# EAGLE board USB-C_Host_Shield-Panel (EAGLE 9.6.2), part 1 of 4
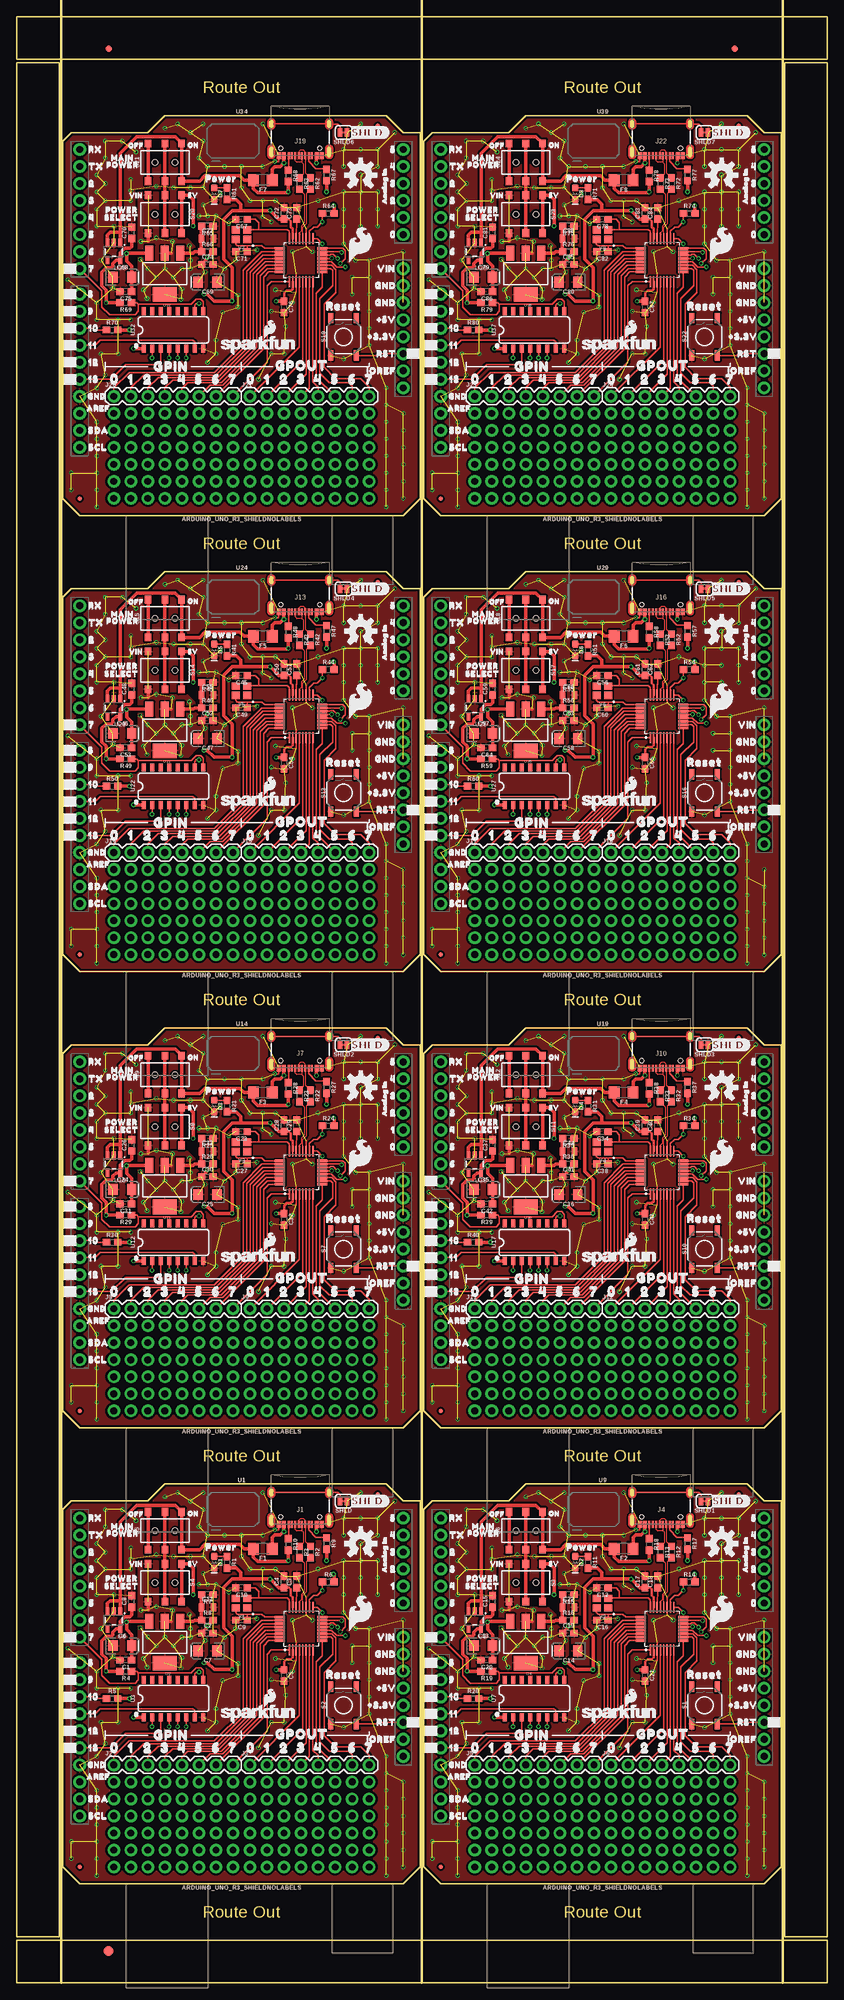
[diagram p0: board, top side]
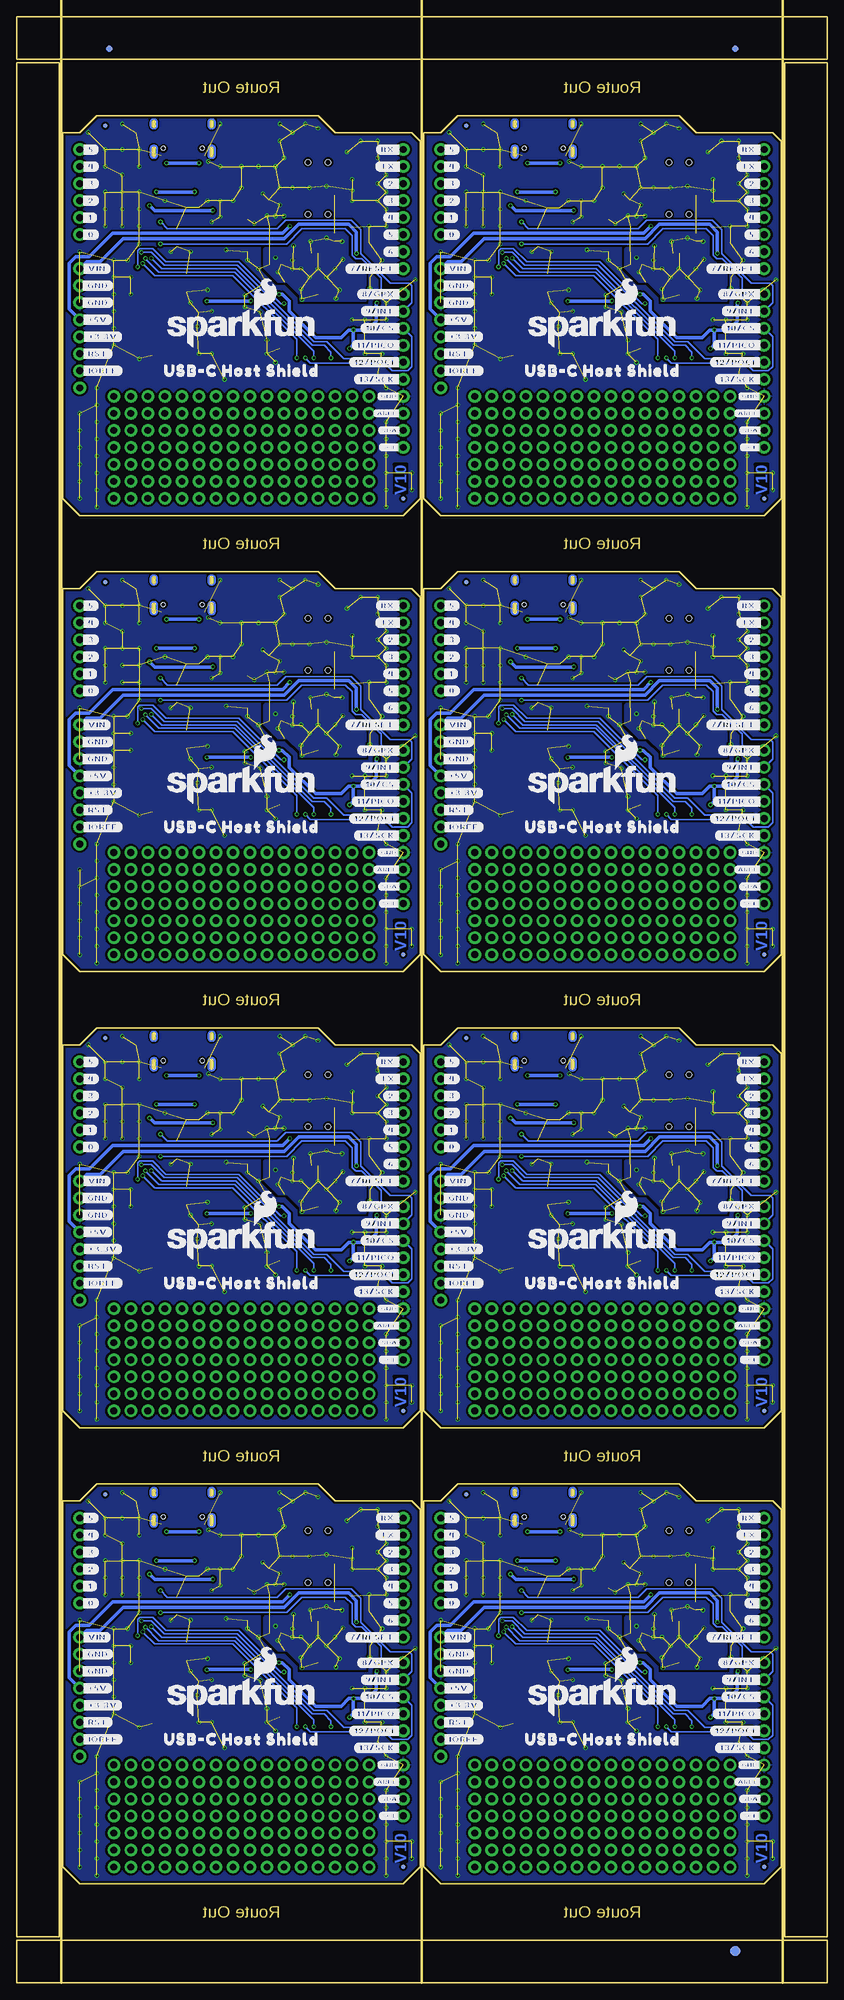
[diagram p1: board, bottom side, seen from below]

Size 120.9 x 293.37 mm. Coordinates in mm from the lower left corner, seen from the top.
Outline: 9.4,14.73 57.66,14.73 60.2,17.27 60.2,71.88 57.66,71.88 55.12,74.42 22.1,74.42 19.56,71.88 8.13,71.88 6.86,70.61 6.86,17.27 9.4,14.73
Outline: 63.25,14.73 111.51,14.73 114.05,17.27 114.05,71.88 111.51,71.88 108.97,74.42 75.95,74.42 73.41,71.88 61.98,71.88 60.71,70.61 60.71,17.27 63.25,14.73
Outline: 9.4,82.8 57.66,82.8 60.2,85.34 60.2,139.95 57.66,139.95 55.12,142.49 22.1,142.49 19.56,139.95 8.13,139.95 6.86,138.68 6.86,85.34 9.4,82.8
Outline: 63.25,82.8 111.51,82.8 114.05,85.34 114.05,139.95 111.51,139.95 108.97,142.49 75.95,142.49 73.41,139.95 61.98,139.95 60.71,138.68 60.71,85.34 63.25,82.8
Outline: 9.4,150.88 57.66,150.88 60.2,153.42 60.2,208.03 57.66,208.03 55.12,210.57 22.1,210.57 19.56,208.03 8.13,208.03 6.86,206.76 6.86,153.42 9.4,150.88
Outline: 63.25,150.88 111.51,150.88 114.05,153.42 114.05,208.03 111.51,208.03 108.97,210.57 75.95,210.57 73.41,208.03 61.98,208.03 60.71,206.76 60.71,153.42 63.25,150.88
Outline: 9.4,218.95 57.66,218.95 60.2,221.49 60.2,276.1 57.66,276.1 55.12,278.64 22.1,278.64 19.56,276.1 8.13,276.1 6.86,274.83 6.86,221.49 9.4,218.95
Outline: 63.25,218.95 111.51,218.95 114.05,221.49 114.05,276.1 111.51,276.1 108.97,278.64 75.95,278.64 73.41,276.1 61.98,276.1 60.71,274.83 60.71,221.49 63.25,218.95
Outline: 0,6.35 120.9,6.35 120.9,0 0,0 0,6.35
Outline: 114.55,286.51 120.9,286.51 120.9,6.86 114.55,6.86 114.55,286.51
Outline: 0,293.37 120.9,293.37 120.9,287.02 0,287.02 0,293.37
Outline: 0,286.51 6.35,286.51 6.35,6.86 0,6.86 0,286.51
Copper layers (1*16): Top 0.035mm / dielectric 1.5mm / Bottom 0.035mm
Design rules "USB-C_Host_Shield": minimum track width 5mil, minimum drill 0.3mm, track to track 5mil, track to pad 5mil, pad to pad 5mil, via to via 5mil, smd to smd 5mil, copper to edge 7mil, drill to drill 7mil, minimum pad ring 5mil, minimum via ring 5mil, stop-mask expansion 2.5mil, vias tented up to drill 25mil, thermal gap 10mil
Net classes: 2 diff pairs: width 0.089 mm
Milling: 3 lines

## Footprints (pad centres in the part's own frame; a part is rotated, then mirrored left to right if it is on the bottom)
0603 = smd 1.1 x 1: 1 -0.85,0; 2 0.85,0
EIA3216 = smd 1.4 x 1.6: + 1.4,0; - -1.4,0
0805 = smd 0.8 x 1.2: 1 -0.9,0; 2 0.9,0
LED-0603 = smd 1 x 1: A -0.877,0; C 0.877,0
FIDUCIAL-1X2 = smd 1 x 1: 1 0,0
FIDUCIAL-1.5X3 = smd 1.5 x 1.5: 1 0,0
1206 = smd 1.6 x 1.8: 1 -1.4,0; 2 1.4,0
FIDUCIAL-MICRO = smd 0.635 x 0.635: 1 0,0
USB-C-16P-2LAYER-PADS = smd 0.3 x 1: A5 -1.25,-0.34; A6 -0.25,-0.34; A7 0.25,-0.34; A8 1.25,-0.34; B5 1.75,-0.34; B6 0.75,-0.34; B7 -0.75,-0.34; B8 -1.75,-0.34 | smd 0.6 x 1: GND -3.225,-0.34; GND2 3.225,-0.34; VBUS1 -2.45,-0.34; VBUS2 2.45,-0.34 | drill 0.4 pad 0.6 long: SHLD1 -4.318,-0.915; SHLD2 4.318,-0.915; SHLD3 -4.318,-5.095; SHLD4 4.318,-5.095 | hole 0.65: -2.89,-1.445; 2.89,-1.445
1X08 = drill 1.016 pad 1.88: 1 0,0; 2 2.54,0; 3 5.08,0; 4 7.62,0; 5 10.16,0; 6 12.7,0; 7 15.24,0; 8 17.78,0
TACTILE_SWITCH_SMD_5.2MM = smd 1.524 x 0.762: 1 -2.794,1.905; 2 2.794,1.905; 3 -2.794,-1.905; 4 2.794,-1.905
SWITCH_DPDT_SMD_AYZ0202 = smd 1 x 1.15: 1 -2.5,2.825; 2 0,2.825; 3 2.5,2.825; 4 -2.5,-2.825; 5 0,-2.825; 6 2.5,-2.825 | hole 0.85: 1.5,0; -1.5,0
SMT-JUMPER_2_NC_TRACE_SILK = smd 0.66 x 1.27: 1 -0.521,0; 2 0.521,0
UNO_R3_SHIELD_NOLABELS = drill 1.016 pad 1.88: 3.3V 24.13,-3.81; 5V 24.13,-1.27; A0 24.13,11.43; A1 24.13,13.97; A2 24.13,16.51; A3 24.13,19.05; A4 24.13,21.59; A5 24.13,24.13; AREF -24.13,-15.24; D2 -24.13,19.05; D3 -24.13,16.51; D4 -24.13,13.97; D5 -24.13,11.43; D6 -24.13,8.89; D7 -24.13,6.35; D8 -24.13,2.54; D9 -24.13,0; D10 -24.13,-2.54; D11 -24.13,-5.08; D12 -24.13,-7.62; D13 -24.13,-10.16; GND@0 24.13,1.27; GND@1 24.13,3.81; GND@2 -24.13,-12.7; IOREF 24.13,-8.89; NC 24.13,-11.43; RES 24.13,-6.35; RX -24.13,24.13; SCL -24.13,-20.32; SDA -24.13,-17.78; TX -24.13,21.59; VIN 24.13,6.35
SOT223 = smd 1.219 x 2.235: 1 -2.311,-3.099; 2 0,-3.099; 3 2.311,-3.099 | smd 3.6 x 2.2: 4 0,3.099
SO16 = smd 0.6 x 1.2: 1 -4.445,-2.8; 2 -3.175,-2.8; 3 -1.905,-2.8; 4 -0.635,-2.8; 5 0.635,-2.8; 6 1.905,-2.8; 7 3.175,-2.8; 8 4.445,-2.8; 9 4.445,2.8; 10 3.175,2.8; 11 1.905,2.8; 12 0.635,2.8; 13 -0.635,2.8; 14 -1.905,2.8; 15 -3.175,2.8; 16 -4.445,2.8
TQFP32 = smd 1.56 x 0.28: 1 -3.18,1.75; 2 -3.18,1.25; 3 -3.18,0.75; 4 -3.18,0.25; 5 -3.18,-0.25; 6 -3.18,-0.75; 7 -3.18,-1.25; 8 -3.18,-1.75; 17 3.18,-1.75; 18 3.18,-1.25; 19 3.18,-0.75; 20 3.18,-0.25; 21 3.18,0.25; 22 3.18,0.75; 23 3.18,1.25; 24 3.18,1.75 | smd 0.28 x 1.56: 9 -1.75,-3.18; 10 -1.25,-3.18; 11 -0.75,-3.18; 12 -0.25,-3.18; 13 0.25,-3.18; 14 0.75,-3.18; 15 1.25,-3.18; 16 1.75,-3.18; 25 1.75,3.18; 26 1.25,3.18; 27 0.75,3.18; 28 0.25,3.18; 29 -0.25,3.18; 30 -0.75,3.18; 31 -1.25,3.18; 32 -1.75,3.18
SOT23-5 = smd 0.55 x 1.2: 1 -0.95,-1.3; 2 0,-1.3; 3 0.95,-1.3; 4 0.95,1.3; 5 -0.95,1.3
CRYSTAL-SMD-2X2.5MM = smd 1.2 x 1.1: P1 0.846,0.69; P2 -0.854,0.69; P3 -0.854,-0.71; P4 0.846,-0.71

## Placement (x,y rotation side)
C1  0.1uF  [0603]  16.26,48.13 180 top
C2  0.1uF  [0603]  28.45,52.2 0 top
C3  0.1uF  [0603]  41.78,59.82 90 top
C4  0.1uF  [0603]  39.88,59.82 90 top
C5  0.1uF  [0603]  39.88,45.85 270 top
C6  10uF  [EIA3216]  15.75,50.29 0 top
C7  10uF  [EIA3216]  28.45,49.53 180 top
C8  10uF  [0603]  17.14,56.9 90 top
C9  18pF  [0603]  33.53,54.1 180 top
C10  18pF  [0603]  33.53,58.93 180 top
C11  10uF  [0805]  28.45,56.01 0 top
C12  18pF  [0603]  87.38,58.93 180 top
C13  10uF  [EIA3216]  69.6,50.29 0 top
C14  10uF  [EIA3216]  82.3,49.53 180 top
C15  10uF  [0603]  70.99,56.9 90 top
C16  18pF  [0603]  87.38,54.1 180 top
C17  0.1uF  [0603]  93.73,59.82 90 top
C18  0.1uF  [0603]  95.63,59.82 90 top
C19  0.1uF  [0603]  82.3,52.2 0 top
C20  0.1uF  [0603]  70.1,48.13 180 top
C21  0.1uF  [0603]  93.73,45.85 270 top
C22  10uF  [0805]  82.3,56.01 0 top
C23  18pF  [0603]  33.53,127 180 top
C24  10uF  [EIA3216]  15.75,118.36 0 top
C25  10uF  [EIA3216]  28.45,117.6 180 top
C26  10uF  [0603]  17.14,124.97 90 top
C27  18pF  [0603]  33.53,122.17 180 top
C28  0.1uF  [0603]  39.88,127.89 90 top
C29  0.1uF  [0603]  41.78,127.89 90 top
C30  0.1uF  [0603]  28.45,120.27 0 top
C31  0.1uF  [0603]  16.26,116.2 180 top
C32  0.1uF  [0603]  39.88,113.92 270 top
C33  10uF  [0805]  28.45,124.08 0 top
C34  18pF  [0603]  87.38,127 180 top
C35  10uF  [EIA3216]  69.6,118.36 0 top
C36  10uF  [EIA3216]  82.3,117.6 180 top
C37  10uF  [0603]  70.99,124.97 90 top
C38  18pF  [0603]  87.38,122.17 180 top
C39  0.1uF  [0603]  93.73,127.89 90 top
C40  0.1uF  [0603]  95.63,127.89 90 top
C41  0.1uF  [0603]  82.3,120.27 0 top
C42  0.1uF  [0603]  70.1,116.2 180 top
C43  0.1uF  [0603]  93.73,113.92 270 top
C44  10uF  [0805]  82.3,124.08 0 top
C45  18pF  [0603]  33.53,195.07 180 top
C46  10uF  [EIA3216]  15.75,186.44 0 top
C47  10uF  [EIA3216]  28.45,185.67 180 top
C48  10uF  [0603]  17.14,193.04 90 top
C49  18pF  [0603]  33.53,190.25 180 top
C50  0.1uF  [0603]  39.88,195.96 90 top
C51  0.1uF  [0603]  41.78,195.96 90 top
C52  0.1uF  [0603]  28.45,188.34 0 top
C53  0.1uF  [0603]  16.26,184.28 180 top
C54  0.1uF  [0603]  39.88,181.99 270 top
C55  10uF  [0805]  28.45,192.15 0 top
C56  18pF  [0603]  87.38,195.07 180 top
C57  10uF  [EIA3216]  69.6,186.44 0 top
C58  10uF  [EIA3216]  82.3,185.67 180 top
C59  10uF  [0603]  70.99,193.04 90 top
C60  18pF  [0603]  87.38,190.25 180 top
C61  0.1uF  [0603]  93.73,195.96 90 top
C62  0.1uF  [0603]  95.63,195.96 90 top
C63  0.1uF  [0603]  82.3,188.34 0 top
C64  0.1uF  [0603]  70.1,184.28 180 top
C65  0.1uF  [0603]  93.73,181.99 270 top
C66  10uF  [0805]  82.3,192.15 0 top
C67  18pF  [0603]  33.53,263.14 180 top
C68  10uF  [EIA3216]  15.75,254.51 0 top
C69  10uF  [EIA3216]  28.45,253.75 180 top
C70  10uF  [0603]  17.14,261.11 90 top
C71  18pF  [0603]  33.53,258.32 180 top
C72  0.1uF  [0603]  39.88,264.03 90 top
C73  0.1uF  [0603]  41.78,264.03 90 top
C74  0.1uF  [0603]  28.45,256.41 0 top
C75  0.1uF  [0603]  16.26,252.35 180 top
C76  0.1uF  [0603]  39.88,250.06 270 top
C77  10uF  [0805]  28.45,260.22 0 top
C78  18pF  [0603]  87.38,263.14 180 top
C79  10uF  [EIA3216]  69.6,254.51 0 top
C80  10uF  [EIA3216]  82.3,253.75 180 top
C81  10uF  [0603]  70.99,261.11 90 top
C82  18pF  [0603]  87.38,258.32 180 top
C83  0.1uF  [0603]  93.73,264.03 90 top
C84  0.1uF  [0603]  95.63,264.03 90 top
C85  0.1uF  [0603]  82.3,256.41 0 top
C86  0.1uF  [0603]  70.1,252.35 180 top
C87  0.1uF  [0603]  93.73,250.06 270 top
C88  10uF  [0805]  82.3,260.22 0 top
D1  RED  [LED-0603]  29.46,62.74 270 top
D2  RED  [LED-0603]  83.31,62.74 270 top
D3  RED  [LED-0603]  29.46,130.81 270 top
D4  RED  [LED-0603]  83.31,130.81 270 top
D5  RED  [LED-0603]  29.46,198.88 270 top
D6  RED  [LED-0603]  83.31,198.88 270 top
D7  RED  [LED-0603]  29.46,266.95 270 top
D8  RED  [LED-0603]  83.31,266.95 270 top
E$1  [FIDUCIAL-1X2]  13.72,288.61 0 top
E$2  [FIDUCIAL-1X2]  13.72,288.61 0 bottom
E$3  [FIDUCIAL-1X2]  107.12,288.61 0 top
E$4  [FIDUCIAL-1X2]  107.12,288.61 0 bottom
E$5  [FIDUCIAL-1.5X3]  13.72,4.76 0 top
E$6  [FIDUCIAL-1.5X3]  13.72,4.76 0 bottom
F1  6V/0.75A  [1206]  36.7,64.77 180 top
F2  6V/0.75A  [1206]  90.55,64.77 180 top
F3  6V/0.75A  [1206]  36.7,132.84 180 top
F4  6V/0.75A  [1206]  90.55,132.84 180 top
F5  6V/0.75A  [1206]  36.7,200.91 180 top
F6  6V/0.75A  [1206]  90.55,200.91 180 top
F7  6V/0.75A  [1206]  36.7,268.99 180 top
F8  6V/0.75A  [1206]  90.55,268.99 180 top
FD1  FIDUCIALUFIDUCIAL  [FIDUCIAL-MICRO]  9.4,17.27 0 bottom
FD2  FIDUCIALUFIDUCIAL  [FIDUCIAL-MICRO]  9.4,17.27 90 top
FD3  FIDUCIALUFIDUCIAL  [FIDUCIAL-MICRO]  53.85,72.9 0 bottom
FD4  FIDUCIALUFIDUCIAL  [FIDUCIAL-MICRO]  53.85,72.9 0 top
FD5  FIDUCIALUFIDUCIAL  [FIDUCIAL-MICRO]  63.25,17.27 0 bottom
FD6  FIDUCIALUFIDUCIAL  [FIDUCIAL-MICRO]  63.25,17.27 90 top
FD7  FIDUCIALUFIDUCIAL  [FIDUCIAL-MICRO]  107.7,72.9 0 bottom
FD8  FIDUCIALUFIDUCIAL  [FIDUCIAL-MICRO]  107.7,72.9 0 top
FD9  FIDUCIALUFIDUCIAL  [FIDUCIAL-MICRO]  9.4,85.34 0 bottom
FD10  FIDUCIALUFIDUCIAL  [FIDUCIAL-MICRO]  9.4,85.34 90 top
FD11  FIDUCIALUFIDUCIAL  [FIDUCIAL-MICRO]  53.85,140.97 0 bottom
FD12  FIDUCIALUFIDUCIAL  [FIDUCIAL-MICRO]  53.85,140.97 0 top
FD13  FIDUCIALUFIDUCIAL  [FIDUCIAL-MICRO]  63.25,85.34 0 bottom
FD14  FIDUCIALUFIDUCIAL  [FIDUCIAL-MICRO]  63.25,85.34 90 top
FD15  FIDUCIALUFIDUCIAL  [FIDUCIAL-MICRO]  107.7,140.97 0 bottom
FD16  FIDUCIALUFIDUCIAL  [FIDUCIAL-MICRO]  107.7,140.97 0 top
FD17  FIDUCIALUFIDUCIAL  [FIDUCIAL-MICRO]  9.4,153.42 0 bottom
FD18  FIDUCIALUFIDUCIAL  [FIDUCIAL-MICRO]  9.4,153.42 90 top
FD19  FIDUCIALUFIDUCIAL  [FIDUCIAL-MICRO]  53.85,209.04 0 bottom
FD20  FIDUCIALUFIDUCIAL  [FIDUCIAL-MICRO]  53.85,209.04 0 top
FD21  FIDUCIALUFIDUCIAL  [FIDUCIAL-MICRO]  63.25,153.42 0 bottom
FD22  FIDUCIALUFIDUCIAL  [FIDUCIAL-MICRO]  63.25,153.42 90 top
FD23  FIDUCIALUFIDUCIAL  [FIDUCIAL-MICRO]  107.7,209.04 0 bottom
FD24  FIDUCIALUFIDUCIAL  [FIDUCIAL-MICRO]  107.7,209.04 0 top
FD25  FIDUCIALUFIDUCIAL  [FIDUCIAL-MICRO]  9.4,221.49 0 bottom
FD26  FIDUCIALUFIDUCIAL  [FIDUCIAL-MICRO]  9.4,221.49 90 top
FD27  FIDUCIALUFIDUCIAL  [FIDUCIAL-MICRO]  53.85,277.11 0 bottom
FD28  FIDUCIALUFIDUCIAL  [FIDUCIAL-MICRO]  53.85,277.11 0 top
FD29  FIDUCIALUFIDUCIAL  [FIDUCIAL-MICRO]  63.25,221.49 0 bottom
FD30  FIDUCIALUFIDUCIAL  [FIDUCIAL-MICRO]  63.25,221.49 90 top
FD31  FIDUCIALUFIDUCIAL  [FIDUCIAL-MICRO]  107.7,277.11 0 bottom
FD32  FIDUCIALUFIDUCIAL  [FIDUCIAL-MICRO]  107.7,277.11 0 top
FRAME1  FRAME-LETTER  [CREATIVE_COMMONS]  8.13,-15.75 0 top  (outside the outline)
FRAME2  FRAME-LETTER  [CREATIVE_COMMONS]  61.98,-15.75 0 top  (outside the outline)
FRAME3  FRAME-LETTER  [CREATIVE_COMMONS]  8.13,52.32 0 top
FRAME4  FRAME-LETTER  [CREATIVE_COMMONS]  61.98,52.32 0 top
FRAME5  FRAME-LETTER  [CREATIVE_COMMONS]  8.13,120.4 0 top
FRAME6  FRAME-LETTER  [CREATIVE_COMMONS]  61.98,120.4 0 top
FRAME7  FRAME-LETTER  [CREATIVE_COMMONS]  8.13,188.47 0 top
FRAME8  FRAME-LETTER  [CREATIVE_COMMONS]  61.98,188.47 0 top
J1  USB-C  [USB-C-16P-2LAYER-PADS]  42.29,68.07 180 top
J2  GPIN  [1X08]  14.48,32.51 0 top
J3  GPOUT  [1X08]  34.8,32.51 0 top
J4  USB-C  [USB-C-16P-2LAYER-PADS]  96.14,68.07 180 top
J5  GPIN  [1X08]  68.33,32.51 0 top
J6  GPOUT  [1X08]  88.65,32.51 0 top
J7  USB-C  [USB-C-16P-2LAYER-PADS]  42.29,136.14 180 top
J8  GPIN  [1X08]  14.48,100.58 0 top
J9  GPOUT  [1X08]  34.8,100.58 0 top
J10  USB-C  [USB-C-16P-2LAYER-PADS]  96.14,136.14 180 top
J11  GPIN  [1X08]  68.33,100.58 0 top
J12  GPOUT  [1X08]  88.65,100.58 0 top
J13  USB-C  [USB-C-16P-2LAYER-PADS]  42.29,204.22 180 top
J14  GPIN  [1X08]  14.48,168.66 0 top
J15  GPOUT  [1X08]  34.8,168.66 0 top
J16  USB-C  [USB-C-16P-2LAYER-PADS]  96.14,204.22 180 top
J17  GPIN  [1X08]  68.33,168.66 0 top
J18  GPOUT  [1X08]  88.65,168.66 0 top
J19  USB-C  [USB-C-16P-2LAYER-PADS]  42.29,272.29 180 top
J20  GPIN  [1X08]  14.48,236.73 0 top
J21  GPOUT  [1X08]  34.8,236.73 0 top
J22  USB-C  [USB-C-16P-2LAYER-PADS]  96.14,272.29 180 top
J23  GPIN  [1X08]  68.33,236.73 0 top
J24  GPOUT  [1X08]  88.65,236.73 0 top
LOGO1  OSHW-LOGOM  [OSHW-LOGO-M]  51.31,65.53 0 top
LOGO2  SFE_LOGO_NAME_FLAME.1_INCH  [SFE_LOGO_NAME_FLAME_.1]  36.07,40.13 0 top
LOGO3  SFE_LOGO_NAME_FLAME.2_INCH  [SFE_LOGO_NAME_FLAME_.2]  33.53,42.67 0 bottom
LOGO4  OSHW-LOGOM  [OSHW-LOGO-M]  105.16,65.53 0 top
LOGO5  SFE_LOGO_NAME_FLAME.1_INCH  [SFE_LOGO_NAME_FLAME_.1]  89.92,40.13 0 top
LOGO6  SFE_LOGO_NAME_FLAME.2_INCH  [SFE_LOGO_NAME_FLAME_.2]  87.38,42.67 0 bottom
LOGO7  REVISION  [REVISION]  19.56,-18.29 0 top  (outside the outline)
LOGO8  REVISION  [REVISION]  73.41,-18.29 0 top  (outside the outline)
LOGO9  OSHW-LOGOM  [OSHW-LOGO-M]  51.31,133.6 0 top
LOGO10  SFE_LOGO_NAME_FLAME.1_INCH  [SFE_LOGO_NAME_FLAME_.1]  36.07,108.2 0 top
LOGO11  SFE_LOGO_NAME_FLAME.2_INCH  [SFE_LOGO_NAME_FLAME_.2]  33.53,110.74 0 bottom
LOGO12  REVISION  [REVISION]  19.56,49.78 0 top
LOGO13  OSHW-LOGOM  [OSHW-LOGO-M]  105.16,133.6 0 top
LOGO14  SFE_LOGO_NAME_FLAME.1_INCH  [SFE_LOGO_NAME_FLAME_.1]  89.92,108.2 0 top
LOGO15  SFE_LOGO_NAME_FLAME.2_INCH  [SFE_LOGO_NAME_FLAME_.2]  87.38,110.74 0 bottom
LOGO16  REVISION  [REVISION]  73.41,49.78 0 top
LOGO17  OSHW-LOGOM  [OSHW-LOGO-M]  51.31,201.68 0 top
LOGO18  SFE_LOGO_NAME_FLAME.1_INCH  [SFE_LOGO_NAME_FLAME_.1]  36.07,176.28 0 top
LOGO19  SFE_LOGO_NAME_FLAME.2_INCH  [SFE_LOGO_NAME_FLAME_.2]  33.53,178.82 0 bottom
LOGO20  REVISION  [REVISION]  19.56,117.86 0 top
LOGO21  OSHW-LOGOM  [OSHW-LOGO-M]  105.16,201.68 0 top
LOGO22  SFE_LOGO_NAME_FLAME.1_INCH  [SFE_LOGO_NAME_FLAME_.1]  89.92,176.28 0 top
LOGO23  SFE_LOGO_NAME_FLAME.2_INCH  [SFE_LOGO_NAME_FLAME_.2]  87.38,178.82 0 bottom
LOGO24  REVISION  [REVISION]  73.41,117.86 0 top
LOGO25  OSHW-LOGOM  [OSHW-LOGO-M]  51.31,269.75 0 top
LOGO26  SFE_LOGO_NAME_FLAME.1_INCH  [SFE_LOGO_NAME_FLAME_.1]  36.07,244.35 0 top
LOGO27  SFE_LOGO_NAME_FLAME.2_INCH  [SFE_LOGO_NAME_FLAME_.2]  33.53,246.89 0 bottom
LOGO28  REVISION  [REVISION]  19.56,185.93 0 top
LOGO29  OSHW-LOGOM  [OSHW-LOGO-M]  105.16,269.75 0 top
LOGO30  SFE_LOGO_NAME_FLAME.1_INCH  [SFE_LOGO_NAME_FLAME_.1]  89.92,244.35 0 top
LOGO31  SFE_LOGO_NAME_FLAME.2_INCH  [SFE_LOGO_NAME_FLAME_.2]  87.38,246.89 0 bottom
LOGO32  REVISION  [REVISION]  73.41,185.93 0 top
R1  1k  [0603]  31.37,62.74 270 top
R2  33  [0603]  43.81,64.26 270 top
R3  33  [0603]  42.16,64.26 270 top
R4  10k  [0603]  16.26,46.48 180 top
R5  10k  [0603]  14.22,42.42 0 top
R6  2.2k  [0603]  46.48,59.82 0 top
R7  715  [0603]  28.45,57.91 180 top
R8  240  [0603]  28.45,54.1 0 top
R9  56k  [0603]  46.23,65.53 270 top
R10  56k  [0603]  40.51,65.41 270 top
R11  1k  [0603]  85.22,62.74 270 top
R12  33  [0603]  97.66,64.26 270 top
R13  33  [0603]  96.01,64.26 270 top
R14  2.2k  [0603]  100.33,59.82 0 top
R15  715  [0603]  82.3,57.91 180 top
R16  240  [0603]  82.3,54.1 0 top
R17  56k  [0603]  100.08,65.53 270 top
R18  56k  [0603]  94.36,65.41 270 top
R19  10k  [0603]  70.1,46.48 180 top
R20  10k  [0603]  68.07,42.42 0 top
R21  1k  [0603]  31.37,130.81 270 top
R22  33  [0603]  43.81,132.33 270 top
R23  33  [0603]  42.16,132.33 270 top
R24  2.2k  [0603]  46.48,127.89 0 top
R25  715  [0603]  28.45,125.98 180 top
R26  240  [0603]  28.45,122.17 0 top
R27  56k  [0603]  46.23,133.6 270 top
R28  56k  [0603]  40.51,133.48 270 top
R29  10k  [0603]  16.26,114.55 180 top
R30  10k  [0603]  14.22,110.49 0 top
R31  1k  [0603]  85.22,130.81 270 top
R32  33  [0603]  97.66,132.33 270 top
R33  33  [0603]  96.01,132.33 270 top
R34  2.2k  [0603]  100.33,127.89 0 top
R35  715  [0603]  82.3,125.98 180 top
R36  240  [0603]  82.3,122.17 0 top
R37  56k  [0603]  100.08,133.6 270 top
R38  56k  [0603]  94.36,133.48 270 top
R39  10k  [0603]  70.1,114.55 180 top
R40  10k  [0603]  68.07,110.49 0 top
R41  1k  [0603]  31.37,198.88 270 top
R42  33  [0603]  43.81,200.41 270 top
R43  33  [0603]  42.16,200.41 270 top
R44  2.2k  [0603]  46.48,195.96 0 top
R45  715  [0603]  28.45,194.06 180 top
R46  240  [0603]  28.45,190.25 0 top
R47  56k  [0603]  46.23,201.68 270 top
R48  56k  [0603]  40.51,201.55 270 top
R49  10k  [0603]  16.26,182.63 180 top
R50  10k  [0603]  14.22,178.56 0 top
R51  1k  [0603]  85.22,198.88 270 top
R52  33  [0603]  97.66,200.41 270 top
R53  33  [0603]  96.01,200.41 270 top
R54  2.2k  [0603]  100.33,195.96 0 top
R55  715  [0603]  82.3,194.06 180 top
R56  240  [0603]  82.3,190.25 0 top
R57  56k  [0603]  100.08,201.68 270 top
R58  56k  [0603]  94.36,201.55 270 top
R59  10k  [0603]  70.1,182.63 180 top
R60  10k  [0603]  68.07,178.56 0 top
R61  1k  [0603]  31.37,266.95 270 top
R62  33  [0603]  43.81,268.48 270 top
R63  33  [0603]  42.16,268.48 270 top
R64  2.2k  [0603]  46.48,264.03 0 top
R65  715  [0603]  28.45,262.13 180 top
R66  240  [0603]  28.45,258.32 0 top
R67  56k  [0603]  46.23,269.75 270 top
R68  56k  [0603]  40.51,269.62 270 top
R69  10k  [0603]  16.26,250.7 180 top
R70  10k  [0603]  14.22,246.63 0 top
R71  1k  [0603]  85.22,266.95 270 top
R72  33  [0603]  97.66,268.48 270 top
R73  33  [0603]  96.01,268.48 270 top
R74  2.2k  [0603]  100.33,264.03 0 top
R75  715  [0603]  82.3,262.13 180 top
R76  240  [0603]  82.3,258.32 0 top
R77  56k  [0603]  100.08,269.75 270 top
R78  56k  [0603]  94.36,269.62 270 top
R79  10k  [0603]  70.1,250.7 180 top
R80  10k  [0603]  68.07,246.63 0 top
S1  MOMENTARY-SWITCH-SPST-SMD-5.2MM-TALL  [TACTILE_SWITCH_SMD_5.2MM]  102.62,41.4 90 top
S2  MOMENTARY-SWITCH-SPST-SMD-5.2MM-TALL  [TACTILE_SWITCH_SMD_5.2MM]  48.77,41.4 90 top
S3  Power Select  [SWITCH_DPDT_SMD_AYZ0202]  75.95,59.69 180 top
S4  Power Select  [SWITCH_DPDT_SMD_AYZ0202]  22.1,59.69 180 top
S5  Main Power  [SWITCH_DPDT_SMD_AYZ0202]  22.1,67.44 0 top
S6  Main Power  [SWITCH_DPDT_SMD_AYZ0202]  75.95,67.44 0 top
S7  MOMENTARY-SWITCH-SPST-SMD-5.2MM-TALL  [TACTILE_SWITCH_SMD_5.2MM]  48.77,109.47 90 top
S8  Power Select  [SWITCH_DPDT_SMD_AYZ0202]  22.1,127.76 180 top
S9  Main Power  [SWITCH_DPDT_SMD_AYZ0202]  22.1,135.51 0 top
S10  MOMENTARY-SWITCH-SPST-SMD-5.2MM-TALL  [TACTILE_SWITCH_SMD_5.2MM]  102.62,109.47 90 top
S11  Power Select  [SWITCH_DPDT_SMD_AYZ0202]  75.95,127.76 180 top
S12  Main Power  [SWITCH_DPDT_SMD_AYZ0202]  75.95,135.51 0 top
S13  MOMENTARY-SWITCH-SPST-SMD-5.2MM-TALL  [TACTILE_SWITCH_SMD_5.2MM]  48.77,177.55 90 top
S14  Power Select  [SWITCH_DPDT_SMD_AYZ0202]  22.1,195.83 180 top
S15  Main Power  [SWITCH_DPDT_SMD_AYZ0202]  22.1,203.58 0 top
S16  MOMENTARY-SWITCH-SPST-SMD-5.2MM-TALL  [TACTILE_SWITCH_SMD_5.2MM]  102.62,177.55 90 top
S17  Power Select  [SWITCH_DPDT_SMD_AYZ0202]  75.95,195.83 180 top
S18  Main Power  [SWITCH_DPDT_SMD_AYZ0202]  75.95,203.58 0 top
S19  MOMENTARY-SWITCH-SPST-SMD-5.2MM-TALL  [TACTILE_SWITCH_SMD_5.2MM]  48.77,245.62 90 top
S20  Power Select  [SWITCH_DPDT_SMD_AYZ0202]  22.1,263.91 180 top
S21  Main Power  [SWITCH_DPDT_SMD_AYZ0202]  22.1,271.65 0 top
S22  MOMENTARY-SWITCH-SPST-SMD-5.2MM-TALL  [TACTILE_SWITCH_SMD_5.2MM]  102.62,245.62 90 top
S23  Power Select  [SWITCH_DPDT_SMD_AYZ0202]  75.95,263.91 180 top
S24  Main Power  [SWITCH_DPDT_SMD_AYZ0202]  75.95,271.65 0 top
SHLD  JUMPER-SMT_2_NC_TRACE_SILK  [SMT-JUMPER_2_NC_TRACE_SILK]  48.77,71.88 180 top
SHLD1  JUMPER-SMT_2_NC_TRACE_SILK  [SMT-JUMPER_2_NC_TRACE_SILK]  102.62,71.88 180 top
SHLD2  JUMPER-SMT_2_NC_TRACE_SILK  [SMT-JUMPER_2_NC_TRACE_SILK]  48.77,139.95 180 top
SHLD3  JUMPER-SMT_2_NC_TRACE_SILK  [SMT-JUMPER_2_NC_TRACE_SILK]  102.62,139.95 180 top
SHLD4  JUMPER-SMT_2_NC_TRACE_SILK  [SMT-JUMPER_2_NC_TRACE_SILK]  48.77,208.03 180 top
SHLD5  JUMPER-SMT_2_NC_TRACE_SILK  [SMT-JUMPER_2_NC_TRACE_SILK]  102.62,208.03 180 top
SHLD6  JUMPER-SMT_2_NC_TRACE_SILK  [SMT-JUMPER_2_NC_TRACE_SILK]  48.77,276.1 180 top
SHLD7  JUMPER-SMT_2_NC_TRACE_SILK  [SMT-JUMPER_2_NC_TRACE_SILK]  102.62,276.1 180 top
U1  ARDUINO_UNO_R3_SHIELDNOLABELS  [UNO_R3_SHIELD_NOLABELS]  33.53,45.21 0 top
U2  LM1117  [SOT223]  22.1,50.8 180 top
U3  74HC4050  [SO16]  23.37,42.42 0 top
U4  LM1117  [SOT223]  75.95,50.8 180 top
U5  MAX3421  [TQFP32]  42.42,52.83 90 top
U6  3.3V/150mA  [SOT23-5]  14.48,54.1 180 top
U7  74HC4050  [SO16]  77.22,42.42 0 top
U8  3.3V/150mA  [SOT23-5]  68.33,54.1 180 top
U9  ARDUINO_UNO_R3_SHIELDNOLABELS  [UNO_R3_SHIELD_NOLABELS]  87.38,45.21 0 top
U10  MAX3421  [TQFP32]  96.27,52.83 90 top
U11  LM1117  [SOT223]  22.1,118.87 180 top
U12  74HC4050  [SO16]  23.37,110.49 0 top
U13  3.3V/150mA  [SOT23-5]  14.48,122.17 180 top
U14  ARDUINO_UNO_R3_SHIELDNOLABELS  [UNO_R3_SHIELD_NOLABELS]  33.53,113.28 0 top
U15  MAX3421  [TQFP32]  42.42,120.9 90 top
U16  LM1117  [SOT223]  75.95,118.87 180 top
U17  74HC4050  [SO16]  77.22,110.49 0 top
U18  3.3V/150mA  [SOT23-5]  68.33,122.17 180 top
U19  ARDUINO_UNO_R3_SHIELDNOLABELS  [UNO_R3_SHIELD_NOLABELS]  87.38,113.28 0 top
U20  MAX3421  [TQFP32]  96.27,120.9 90 top
U21  LM1117  [SOT223]  22.1,186.94 180 top
U22  74HC4050  [SO16]  23.37,178.56 0 top
U23  3.3V/150mA  [SOT23-5]  14.48,190.25 180 top
U24  ARDUINO_UNO_R3_SHIELDNOLABELS  [UNO_R3_SHIELD_NOLABELS]  33.53,181.36 0 top
U25  MAX3421  [TQFP32]  42.42,188.98 90 top
U26  LM1117  [SOT223]  75.95,186.94 180 top
U27  74HC4050  [SO16]  77.22,178.56 0 top
U28  3.3V/150mA  [SOT23-5]  68.33,190.25 180 top
U29  ARDUINO_UNO_R3_SHIELDNOLABELS  [UNO_R3_SHIELD_NOLABELS]  87.38,181.36 0 top
U30  MAX3421  [TQFP32]  96.27,188.98 90 top
U31  LM1117  [SOT223]  22.1,255.02 180 top
U32  74HC4050  [SO16]  23.37,246.63 0 top
U33  3.3V/150mA  [SOT23-5]  14.48,258.32 180 top
U34  ARDUINO_UNO_R3_SHIELDNOLABELS  [UNO_R3_SHIELD_NOLABELS]  33.53,249.43 0 top
U35  MAX3421  [TQFP32]  42.42,257.05 90 top
U36  LM1117  [SOT223]  75.95,255.02 180 top
U37  74HC4050  [SO16]  77.22,246.63 0 top
U38  3.3V/150mA  [SOT23-5]  68.33,258.32 180 top
U39  ARDUINO_UNO_R3_SHIELDNOLABELS  [UNO_R3_SHIELD_NOLABELS]  87.38,249.43 0 top
U40  MAX3421  [TQFP32]  96.27,257.05 90 top
U$1  [5V6]  26.29,62.48 0 top
U$2  [POWER23]  30.48,65.02 0 top
U$3  [GPIN42]  22.99,36.96 0 top
U$4  [SFE_LOGO_FLAME_.2]  51.31,55.12 0 top
U$5  [ON26]  26.33,70 0 top
U$6  [RESET25]  48.77,45.97 0 top
U$7  [OFF27]  17.8,69.91 0 top
U$8  [ANALOG_IN28]  54.86,63.88 90 top
U$9  [USB#C_HOST_SHIELD32]  33.53,36.32 0 bottom
U$10  [POWER11]  15.62,60.33 0 top
U$11  [SHLD#33]  52.32,71.88 0 top
U$12  [VIN7]  17.78,62.48 0 top
U$13  [SELECT12]  15.62,59.18 0 top
U$14  [POWER38]  15.75,67.06 0 top
U$15  [MAIN40]  15.75,68.07 0 top
U$16  [GPOUT44]  42.54,37.08 0 top
U$17  [045]  34.92,35.05 0 top
U$18  [146]  37.34,35.05 0 top
U$19  [2147]  39.88,35.05 0 top
U$20  [32148]  42.42,35.05 0 top
U$21  [4332150]  44.96,35.05 0 top
U$22  [4332150]  24.64,35.05 0 top
U$23  [54332151]  27.18,35.05 0 top
U$24  [654332152]  50.04,35.05 0 top
U$25  [54332151]  47.5,35.05 0 top
U$26  [654332152]  29.72,35.05 0 top
U$27  [7654332153]  52.58,35.05 0 top
U$28  [7654332153]  32.26,35.05 0 top
U$29  [045]  14.61,35.05 0 top
U$30  [146]  17.02,35.05 0 top
U$31  [2147]  19.56,35.05 0 top
U$32  [32148]  22.1,35.05 0 top
U$33  [#5V4]  55.12,43.94 0 top
U$34  [VIN6]  55.12,51.56 0 top
U$35  [GND131211109817654321131211211109876543260]  54.99,46.48 0 top
U$36  [SDA131211109817654321131211211109876543261]  12.19,27.43 0 top
U$37  [GND131211211109876543229]  11.94,32.51 0 top
U$38  [21131211211109876543246]  11.18,64.26 0 top
U$39  [321131211211109876543247]  11.18,61.72 0 top
U$40  [4321131211211109876543248]  11.18,59.18 0 top
U$41  [54321131211211109876543249]  11.18,56.64 0 top
U$42  [654321131211211109876543250]  11.18,54.1 0 top
U$43  [7654321131211211109876543251]  11.18,51.56 0 top
U$44  [17654321131211211109876543252]  56.13,59.18 0 top
U$45  [017654321131211211109876543253]  56.13,56.64 0 top
U$46  [9817654321131211211109876543255]  11.05,45.21 0 top
U$47  [109817654321131211211109876543256]  11.43,42.67 0 top
U$48  [11109817654321131211211109876543257]  11.3,40.13 0 top
U$49  [1211109817654321131211211109876543258]  11.43,37.59 0 top
U$50  [131211109817654321131211211109876543259]  11.43,35.05 0 top
U$51  [GND131211109817654321131211211109876543260]  54.99,49.02 0 top
U$52  [AREF131211211109876543230]  12.19,30.73 0 top
U$53  [SCL131211109817654321131211211109876543262]  12.06,24.89 0 top
U$54  [IOREF131211109817654321131211211109876543264]  54.36,36.32 0 top
U$55  [21131211211109876543246]  56.13,61.72 0 top
U$56  [321131211211109876543247]  56.13,64.26 0 top
U$57  [4321131211211109876543248]  56.13,66.8 0 top
U$58  [54321131211211109876543249]  56.13,69.34 0 top
U$59  [817654321131211211109876543254]  11.05,47.75 0 top
U$60  [RST131211109817654321131211211109876543265]  55.12,38.86 0 top
U$61  [#_4#6]  56.13,66.8 0 bottom
U$62  [#3#3V4]  54.48,41.4 0 top
U$63  [#_5#6]  56.13,69.34 0 bottom
U$64  [RX13]  11.68,69.34 0 top
U$65  [TX1131211211109876543245]  11.81,66.8 0 top
U$66  [#_3#6]  56.13,64.26 0 bottom
U$67  [#_2#6]  56.13,61.72 0 bottom
U$68  [#_1#6]  56.26,59.18 0 bottom
U$69  [#_0#6]  56.13,56.64 0 bottom
U$70  [#_VIN#6]  55.24,51.56 0 bottom
U$71  [#_GND#7]  55.12,49.02 0 bottom
U$72  [#_GND#7]  55.12,46.48 0 bottom
U$73  [#_#5V#8]  55.12,43.94 0 bottom
U$74  [#_#3#3V#8]  54.36,41.4 0 bottom
U$75  [#_RST#8]  55.12,38.86 0 bottom
U$76  [#_IOREF#9]  54.36,36.32 0 bottom
U$77  [#RX_#10]  11.56,69.34 0 bottom
U$78  [#TX_#11]  11.56,66.8 0 bottom
U$79  [#2_#12]  11.05,64.26 0 bottom
U$80  [#3_#12]  11.05,61.72 0 bottom
U$81  [#4_#12]  11.05,59.18 0 bottom
U$82  [#5_#12]  11.05,56.64 0 bottom
U$83  [#6_#12]  11.05,54.1 0 bottom
U$84  [#7#RESET_#12]  13.84,51.56 0 bottom
U$85  [#8#GPX_#12]  12.95,47.75 0 bottom
U$86  [#9#INT_#12]  12.7,45.21 0 bottom
U$87  [#10#CS_#12]  12.7,42.67 0 bottom
U$88  [#11#PICO_#12]  13.34,40.13 0 bottom
U$89  [#12#POCI_#12]  13.59,37.59 0 bottom
U$90  [#13#SCK_#13]  13.21,35.05 0 bottom
U$91  [POWER23]  84.33,65.02 0 top
U$92  [#GND#21]  11.56,32.51 0 bottom
U$93  [#SDA#18]  11.43,27.43 0 bottom
U$94  [#SCL#19]  11.43,24.89 0 bottom
U$95  [#AREF#20]  11.81,29.97 0 bottom
U$96  [SFE_LOGO_FLAME_.2]  105.16,55.12 0 top
U$97  [RESET25]  102.62,45.97 0 top
U$98  [ON26]  80.17,70 0 top
U$99  [OFF27]  71.65,69.91 0 top
U$100  [ANALOG_IN28]  108.71,63.88 90 top
U$101  [USB#C_HOST_SHIELD32]  87.38,36.32 0 bottom
U$102  [SHLD#33]  106.17,71.88 0 top
U$103  [MAIN40]  69.6,68.07 0 top
U$104  [POWER38]  69.6,67.06 0 top
U$105  [GPIN42]  76.84,36.96 0 top
U$106  [GPOUT44]  96.39,37.08 0 top
U$107  [045]  88.77,35.05 0 top
U$108  [146]  91.19,35.05 0 top
U$109  [2147]  93.73,35.05 0 top
U$110  [32148]  96.27,35.05 0 top
U$111  [4332150]  98.81,35.05 0 top
U$112  [4332150]  78.49,35.05 0 top
U$113  [54332151]  81.03,35.05 0 top
U$114  [54332151]  101.35,35.05 0 top
U$115  [654332152]  103.89,35.05 0 top
U$116  [654332152]  83.57,35.05 0 top
U$117  [7654332153]  106.43,35.05 0 top
U$118  [7654332153]  86.11,35.05 0 top
U$119  [045]  68.45,35.05 0 top
U$120  [146]  70.87,35.05 0 top
U$121  [2147]  73.41,35.05 0 top
U$122  [32148]  75.95,35.05 0 top
U$123  [5V6]  80.14,62.48 0 top
U$124  [VIN7]  71.63,62.48 0 top
U$125  [POWER11]  69.47,60.33 0 top
U$126  [SELECT12]  69.47,59.18 0 top
U$127  [GND131211211109876543229]  65.79,32.51 0 top
U$128  [AREF131211211109876543230]  66.04,30.73 0 top
U$129  [RX13]  65.53,69.34 0 top
U$130  [TX1131211211109876543245]  65.66,66.8 0 top
U$131  [21131211211109876543246]  65.02,64.26 0 top
U$132  [321131211211109876543247]  65.02,61.72 0 top
U$133  [4321131211211109876543248]  65.02,59.18 0 top
U$134  [54321131211211109876543249]  65.02,56.64 0 top
U$135  [654321131211211109876543250]  65.02,54.1 0 top
U$136  [7654321131211211109876543251]  65.02,51.56 0 top
U$137  [17654321131211211109876543252]  109.98,59.18 0 top
U$138  [017654321131211211109876543253]  109.98,56.64 0 top
U$139  [21131211211109876543246]  109.98,61.72 0 top
U$140  [321131211211109876543247]  109.98,64.26 0 top
U$141  [4321131211211109876543248]  109.98,66.8 0 top
U$142  [54321131211211109876543249]  109.98,69.34 0 top
U$143  [817654321131211211109876543254]  64.9,47.75 0 top
U$144  [9817654321131211211109876543255]  64.9,45.21 0 top
U$145  [109817654321131211211109876543256]  65.28,42.67 0 top
U$146  [11109817654321131211211109876543257]  65.15,40.13 0 top
U$147  [1211109817654321131211211109876543258]  65.28,37.59 0 top
U$148  [131211109817654321131211211109876543259]  65.28,35.05 0 top
U$149  [GND131211109817654321131211211109876543260]  108.84,49.02 0 top
U$150  [GND131211109817654321131211211109876543260]  108.84,46.48 0 top
U$151  [SDA131211109817654321131211211109876543261]  66.04,27.43 0 top
U$152  [SCL131211109817654321131211211109876543262]  65.91,24.89 0 top
U$153  [IOREF131211109817654321131211211109876543264]  108.2,36.32 0 top
U$154  [RST131211109817654321131211211109876543265]  108.97,38.86 0 top
U$155  [#3#3V4]  108.33,41.4 0 top
U$156  [#5V4]  108.97,43.94 0 top
U$157  [VIN6]  108.97,51.56 0 top
U$158  [#_5#6]  109.98,69.34 0 bottom
U$159  [#_4#6]  109.98,66.8 0 bottom
U$160  [#_3#6]  109.98,64.26 0 bottom
U$161  [#_2#6]  109.98,61.72 0 bottom
U$162  [#_1#6]  110.11,59.18 0 bottom
U$163  [#_0#6]  109.98,56.64 0 bottom
U$164  [#_VIN#6]  109.09,51.56 0 bottom
U$165  [#_GND#7]  108.97,49.02 0 bottom
U$166  [#_GND#7]  108.97,46.48 0 bottom
U$167  [#_#5V#8]  108.97,43.94 0 bottom
U$168  [#_#3#3V#8]  108.2,41.4 0 bottom
U$169  [#_RST#8]  108.97,38.86 0 bottom
U$170  [#_IOREF#9]  108.2,36.32 0 bottom
U$171  [#RX_#10]  65.41,69.34 0 bottom
U$172  [#TX_#11]  65.41,66.8 0 bottom
U$173  [#2_#12]  64.9,64.26 0 bottom
U$174  [#3_#12]  64.9,61.72 0 bottom
U$175  [#4_#12]  64.9,59.18 0 bottom
U$176  [#5_#12]  64.9,56.64 0 bottom
U$177  [#6_#12]  64.9,54.1 0 bottom
U$178  [#7#RESET_#12]  67.69,51.56 0 bottom
U$179  [#8#GPX_#12]  66.8,47.75 0 bottom
U$180  [#9#INT_#12]  66.55,45.21 0 bottom
U$181  [#10#CS_#12]  66.55,42.67 0 bottom
U$182  [#11#PICO_#12]  67.18,40.13 0 bottom
U$183  [#12#POCI_#12]  67.44,37.59 0 bottom
U$184  [#13#SCK_#13]  67.06,35.05 0 bottom
U$185  [#SDA#18]  65.28,27.43 0 bottom
U$186  [#SCL#19]  65.28,24.89 0 bottom
U$187  [#AREF#20]  65.66,29.97 0 bottom
U$188  [#GND#21]  65.41,32.51 0 bottom
U$189  [POWER23]  30.48,133.1 0 top
U$190  [SFE_LOGO_FLAME_.2]  51.31,123.19 0 top
U$191  [RESET25]  48.77,114.05 0 top
U$192  [ON26]  26.33,138.07 0 top
U$193  [OFF27]  17.8,137.98 0 top
U$194  [ANALOG_IN28]  54.86,131.95 90 top
U$195  [USB#C_HOST_SHIELD32]  33.53,104.39 0 bottom
U$196  [SHLD#33]  52.32,139.95 0 top
U$197  [MAIN40]  15.75,136.14 0 top
U$198  [POWER38]  15.75,135.13 0 top
U$199  [GPIN42]  22.99,105.03 0 top
U$200  [GPOUT44]  42.54,105.16 0 top
U$201  [045]  34.92,103.12 0 top
U$202  [146]  37.34,103.12 0 top
U$203  [2147]  39.88,103.12 0 top
U$204  [32148]  42.42,103.12 0 top
U$205  [4332150]  44.96,103.12 0 top
U$206  [4332150]  24.64,103.12 0 top
U$207  [54332151]  27.18,103.12 0 top
U$208  [54332151]  47.5,103.12 0 top
U$209  [654332152]  50.04,103.12 0 top
U$210  [654332152]  29.72,103.12 0 top
U$211  [7654332153]  52.58,103.12 0 top
U$212  [7654332153]  32.26,103.12 0 top
U$213  [045]  14.61,103.12 0 top
U$214  [146]  17.02,103.12 0 top
U$215  [2147]  19.56,103.12 0 top
U$216  [32148]  22.1,103.12 0 top
U$217  [5V6]  26.29,130.56 0 top
U$218  [VIN7]  17.78,130.56 0 top
U$219  [POWER11]  15.62,128.4 0 top
U$220  [SELECT12]  15.62,127.25 0 top
U$221  [GND131211211109876543229]  11.94,100.58 0 top
U$222  [AREF131211211109876543230]  12.19,98.81 0 top
U$223  [RX13]  11.68,137.41 0 top
U$224  [TX1131211211109876543245]  11.81,134.87 0 top
U$225  [21131211211109876543246]  11.18,132.33 0 top
U$226  [321131211211109876543247]  11.18,129.79 0 top
U$227  [4321131211211109876543248]  11.18,127.25 0 top
U$228  [54321131211211109876543249]  11.18,124.71 0 top
U$229  [654321131211211109876543250]  11.18,122.17 0 top
U$230  [7654321131211211109876543251]  11.18,119.63 0 top
U$231  [17654321131211211109876543252]  56.13,127.25 0 top
U$232  [017654321131211211109876543253]  56.13,124.71 0 top
U$233  [21131211211109876543246]  56.13,129.79 0 top
U$234  [321131211211109876543247]  56.13,132.33 0 top
U$235  [4321131211211109876543248]  56.13,134.87 0 top
U$236  [54321131211211109876543249]  56.13,137.41 0 top
U$237  [817654321131211211109876543254]  11.05,115.82 0 top
U$238  [9817654321131211211109876543255]  11.05,113.28 0 top
U$239  [109817654321131211211109876543256]  11.43,110.74 0 top
U$240  [11109817654321131211211109876543257]  11.3,108.2 0 top
U$241  [1211109817654321131211211109876543258]  11.43,105.66 0 top
U$242  [131211109817654321131211211109876543259]  11.43,103.12 0 top
U$243  [GND131211109817654321131211211109876543260]  54.99,117.09 0 top
U$244  [GND131211109817654321131211211109876543260]  54.99,114.55 0 top
U$245  [SDA131211109817654321131211211109876543261]  12.19,95.5 0 top
U$246  [SCL131211109817654321131211211109876543262]  12.06,92.96 0 top
U$247  [IOREF131211109817654321131211211109876543264]  54.36,104.39 0 top
U$248  [RST131211109817654321131211211109876543265]  55.12,106.93 0 top
U$249  [#3#3V4]  54.48,109.47 0 top
U$250  [#5V4]  55.12,112.01 0 top
U$251  [VIN6]  55.12,119.63 0 top
U$252  [#_5#6]  56.13,137.41 0 bottom
U$253  [#_4#6]  56.13,134.87 0 bottom
U$254  [#_3#6]  56.13,132.33 0 bottom
U$255  [#_2#6]  56.13,129.79 0 bottom
U$256  [#_1#6]  56.26,127.25 0 bottom
U$257  [#_0#6]  56.13,124.71 0 bottom
U$258  [#_VIN#6]  55.24,119.63 0 bottom
U$259  [#_GND#7]  55.12,117.09 0 bottom
U$260  [#_GND#7]  55.12,114.55 0 bottom
U$261  [#_#5V#8]  55.12,112.01 0 bottom
U$262  [#_#3#3V#8]  54.36,109.47 0 bottom
U$263  [#_RST#8]  55.12,106.93 0 bottom
U$264  [#_IOREF#9]  54.36,104.39 0 bottom
U$265  [#RX_#10]  11.56,137.41 0 bottom
U$266  [#TX_#11]  11.56,134.87 0 bottom
U$267  [#2_#12]  11.05,132.33 0 bottom
U$268  [#3_#12]  11.05,129.79 0 bottom
U$269  [#4_#12]  11.05,127.25 0 bottom
U$270  [#5_#12]  11.05,124.71 0 bottom
U$271  [#6_#12]  11.05,122.17 0 bottom
U$272  [#7#RESET_#12]  13.84,119.63 0 bottom
U$273  [#8#GPX_#12]  12.95,115.82 0 bottom
U$274  [#9#INT_#12]  12.7,113.28 0 bottom
U$275  [#10#CS_#12]  12.7,110.74 0 bottom
U$276  [#11#PICO_#12]  13.34,108.2 0 bottom
U$277  [#12#POCI_#12]  13.59,105.66 0 bottom
U$278  [#13#SCK_#13]  13.21,103.12 0 bottom
U$279  [#SDA#18]  11.43,95.5 0 bottom
U$280  [#SCL#19]  11.43,92.96 0 bottom
U$281  [#AREF#20]  11.81,98.04 0 bottom
U$282  [#GND#21]  11.56,100.58 0 bottom
U$283  [POWER23]  84.33,133.1 0 top
U$284  [SFE_LOGO_FLAME_.2]  105.16,123.19 0 top
U$285  [RESET25]  102.62,114.05 0 top
U$286  [ON26]  80.17,138.07 0 top
U$287  [OFF27]  71.65,137.98 0 top
U$288  [ANALOG_IN28]  108.71,131.95 90 top
U$289  [USB#C_HOST_SHIELD32]  87.38,104.39 0 bottom
U$290  [SHLD#33]  106.17,139.95 0 top
U$291  [MAIN40]  69.6,136.14 0 top
U$292  [POWER38]  69.6,135.13 0 top
U$293  [GPIN42]  76.84,105.03 0 top
U$294  [GPOUT44]  96.39,105.16 0 top
U$295  [045]  88.77,103.12 0 top
U$296  [146]  91.19,103.12 0 top
U$297  [2147]  93.73,103.12 0 top
U$298  [32148]  96.27,103.12 0 top
U$299  [4332150]  98.81,103.12 0 top
U$300  [4332150]  78.49,103.12 0 top
U$301  [54332151]  81.03,103.12 0 top
U$302  [54332151]  101.35,103.12 0 top
U$303  [654332152]  103.89,103.12 0 top
U$304  [654332152]  83.57,103.12 0 top
U$305  [7654332153]  106.43,103.12 0 top
U$306  [7654332153]  86.11,103.12 0 top
U$307  [045]  68.45,103.12 0 top
U$308  [146]  70.87,103.12 0 top
U$309  [2147]  73.41,103.12 0 top
U$310  [32148]  75.95,103.12 0 top
U$311  [5V6]  80.14,130.56 0 top
U$312  [VIN7]  71.63,130.56 0 top
U$313  [POWER11]  69.47,128.4 0 top
U$314  [SELECT12]  69.47,127.25 0 top
U$315  [GND131211211109876543229]  65.79,100.58 0 top
U$316  [AREF131211211109876543230]  66.04,98.81 0 top
U$317  [RX13]  65.53,137.41 0 top
U$318  [TX1131211211109876543245]  65.66,134.87 0 top
U$319  [21131211211109876543246]  65.02,132.33 0 top
U$320  [321131211211109876543247]  65.02,129.79 0 top
U$321  [4321131211211109876543248]  65.02,127.25 0 top
U$322  [54321131211211109876543249]  65.02,124.71 0 top
U$323  [654321131211211109876543250]  65.02,122.17 0 top
U$324  [7654321131211211109876543251]  65.02,119.63 0 top
U$325  [17654321131211211109876543252]  109.98,127.25 0 top
U$326  [017654321131211211109876543253]  109.98,124.71 0 top
U$327  [21131211211109876543246]  109.98,129.79 0 top
U$328  [321131211211109876543247]  109.98,132.33 0 top
U$329  [4321131211211109876543248]  109.98,134.87 0 top
U$330  [54321131211211109876543249]  109.98,137.41 0 top
U$331  [817654321131211211109876543254]  64.9,115.82 0 top
U$332  [9817654321131211211109876543255]  64.9,113.28 0 top
U$333  [109817654321131211211109876543256]  65.28,110.74 0 top
U$334  [11109817654321131211211109876543257]  65.15,108.2 0 top
U$335  [1211109817654321131211211109876543258]  65.28,105.66 0 top
U$336  [131211109817654321131211211109876543259]  65.28,103.12 0 top
U$337  [GND131211109817654321131211211109876543260]  108.84,117.09 0 top
U$338  [GND131211109817654321131211211109876543260]  108.84,114.55 0 top
U$339  [SDA131211109817654321131211211109876543261]  66.04,95.5 0 top
U$340  [SCL131211109817654321131211211109876543262]  65.91,92.96 0 top
U$341  [IOREF131211109817654321131211211109876543264]  108.2,104.39 0 top
U$342  [RST131211109817654321131211211109876543265]  108.97,106.93 0 top
U$343  [#3#3V4]  108.33,109.47 0 top
U$344  [#5V4]  108.97,112.01 0 top
U$345  [VIN6]  108.97,119.63 0 top
U$346  [#_5#6]  109.98,137.41 0 bottom
U$347  [#_4#6]  109.98,134.87 0 bottom
U$348  [#_3#6]  109.98,132.33 0 bottom
U$349  [#_2#6]  109.98,129.79 0 bottom
U$350  [#_1#6]  110.11,127.25 0 bottom
U$351  [#_0#6]  109.98,124.71 0 bottom
U$352  [#_VIN#6]  109.09,119.63 0 bottom
U$353  [#_GND#7]  108.97,117.09 0 bottom
U$354  [#_GND#7]  108.97,114.55 0 bottom
U$355  [#_#5V#8]  108.97,112.01 0 bottom
U$356  [#_#3#3V#8]  108.2,109.47 0 bottom
U$357  [#_RST#8]  108.97,106.93 0 bottom
U$358  [#_IOREF#9]  108.2,104.39 0 bottom
U$359  [#RX_#10]  65.41,137.41 0 bottom
U$360  [#TX_#11]  65.41,134.87 0 bottom
U$361  [#2_#12]  64.9,132.33 0 bottom
U$362  [#3_#12]  64.9,129.79 0 bottom
U$363  [#4_#12]  64.9,127.25 0 bottom
U$364  [#5_#12]  64.9,124.71 0 bottom
U$365  [#6_#12]  64.9,122.17 0 bottom
U$366  [#7#RESET_#12]  67.69,119.63 0 bottom
U$367  [#8#GPX_#12]  66.8,115.82 0 bottom
U$368  [#9#INT_#12]  66.55,113.28 0 bottom
U$369  [#10#CS_#12]  66.55,110.74 0 bottom
U$370  [#11#PICO_#12]  67.18,108.2 0 bottom
U$371  [#12#POCI_#12]  67.44,105.66 0 bottom
U$372  [#13#SCK_#13]  67.06,103.12 0 bottom
U$373  [#SDA#18]  65.28,95.5 0 bottom
U$374  [#SCL#19]  65.28,92.96 0 bottom
U$375  [#AREF#20]  65.66,98.04 0 bottom
U$376  [#GND#21]  65.41,100.58 0 bottom
U$377  [POWER23]  30.48,201.17 0 top
U$378  [SFE_LOGO_FLAME_.2]  51.31,191.26 0 top
U$379  [RESET25]  48.77,182.12 0 top
U$380  [ON26]  26.33,206.14 0 top
U$381  [OFF27]  17.8,206.06 0 top
U$382  [ANALOG_IN28]  54.86,200.03 90 top
U$383  [USB#C_HOST_SHIELD32]  33.53,172.47 0 bottom
U$384  [SHLD#33]  52.32,208.03 0 top
U$385  [MAIN40]  15.75,204.22 0 top
U$386  [POWER38]  15.75,203.2 0 top
U$387  [GPIN42]  22.99,173.1 0 top
U$388  [GPOUT44]  42.54,173.23 0 top
U$389  [045]  34.92,171.2 0 top
U$390  [146]  37.34,171.2 0 top
U$391  [2147]  39.88,171.2 0 top
U$392  [32148]  42.42,171.2 0 top
U$393  [4332150]  44.96,171.2 0 top
U$394  [4332150]  24.64,171.2 0 top
U$395  [54332151]  27.18,171.2 0 top
U$396  [54332151]  47.5,171.2 0 top
U$397  [654332152]  50.04,171.2 0 top
U$398  [654332152]  29.72,171.2 0 top
U$399  [7654332153]  52.58,171.2 0 top
U$400  [7654332153]  32.26,171.2 0 top
U$401  [045]  14.61,171.2 0 top
U$402  [146]  17.02,171.2 0 top
U$403  [2147]  19.56,171.2 0 top
U$404  [32148]  22.1,171.2 0 top
U$405  [5V6]  26.29,198.63 0 top
U$406  [VIN7]  17.78,198.63 0 top
U$407  [POWER11]  15.62,196.47 0 top
U$408  [SELECT12]  15.62,195.33 0 top
U$409  [GND131211211109876543229]  11.94,168.66 0 top
U$410  [AREF131211211109876543230]  12.19,166.88 0 top
U$411  [RX13]  11.68,205.49 0 top
U$412  [TX1131211211109876543245]  11.81,202.95 0 top
U$413  [21131211211109876543246]  11.18,200.41 0 top
U$414  [321131211211109876543247]  11.18,197.87 0 top
U$415  [4321131211211109876543248]  11.18,195.33 0 top
U$416  [54321131211211109876543249]  11.18,192.79 0 top
U$417  [654321131211211109876543250]  11.18,190.25 0 top
U$418  [7654321131211211109876543251]  11.18,187.71 0 top
U$419  [17654321131211211109876543252]  56.13,195.33 0 top
U$420  [017654321131211211109876543253]  56.13,192.79 0 top
U$421  [21131211211109876543246]  56.13,197.87 0 top
U$422  [321131211211109876543247]  56.13,200.41 0 top
U$423  [4321131211211109876543248]  56.13,202.95 0 top
U$424  [54321131211211109876543249]  56.13,205.49 0 top
U$425  [817654321131211211109876543254]  11.05,183.9 0 top
U$426  [9817654321131211211109876543255]  11.05,181.36 0 top
U$427  [109817654321131211211109876543256]  11.43,178.82 0 top
U$428  [11109817654321131211211109876543257]  11.3,176.28 0 top
U$429  [1211109817654321131211211109876543258]  11.43,173.74 0 top
U$430  [131211109817654321131211211109876543259]  11.43,171.2 0 top
U$431  [GND131211109817654321131211211109876543260]  54.99,185.17 0 top
U$432  [GND131211109817654321131211211109876543260]  54.99,182.63 0 top
U$433  [SDA131211109817654321131211211109876543261]  12.19,163.58 0 top
U$434  [SCL131211109817654321131211211109876543262]  12.06,161.04 0 top
U$435  [IOREF131211109817654321131211211109876543264]  54.36,172.47 0 top
U$436  [RST131211109817654321131211211109876543265]  55.12,175.01 0 top
U$437  [#3#3V4]  54.48,177.55 0 top
U$438  [#5V4]  55.12,180.09 0 top
U$439  [VIN6]  55.12,187.71 0 top
U$440  [#_5#6]  56.13,205.49 0 bottom
U$441  [#_4#6]  56.13,202.95 0 bottom
U$442  [#_3#6]  56.13,200.41 0 bottom
U$443  [#_2#6]  56.13,197.87 0 bottom
U$444  [#_1#6]  56.26,195.33 0 bottom
U$445  [#_0#6]  56.13,192.79 0 bottom
U$446  [#_VIN#6]  55.24,187.71 0 bottom
U$447  [#_GND#7]  55.12,185.17 0 bottom
U$448  [#_GND#7]  55.12,182.63 0 bottom
U$449  [#_#5V#8]  55.12,180.09 0 bottom
U$450  [#_#3#3V#8]  54.36,177.55 0 bottom
U$451  [#_RST#8]  55.12,175.01 0 bottom
U$452  [#_IOREF#9]  54.36,172.47 0 bottom
U$453  [#RX_#10]  11.56,205.49 0 bottom
U$454  [#TX_#11]  11.56,202.95 0 bottom
U$455  [#2_#12]  11.05,200.41 0 bottom
U$456  [#3_#12]  11.05,197.87 0 bottom
U$457  [#4_#12]  11.05,195.33 0 bottom
U$458  [#5_#12]  11.05,192.79 0 bottom
U$459  [#6_#12]  11.05,190.25 0 bottom
U$460  [#7#RESET_#12]  13.84,187.71 0 bottom
U$461  [#8#GPX_#12]  12.95,183.9 0 bottom
U$462  [#9#INT_#12]  12.7,181.36 0 bottom
U$463  [#10#CS_#12]  12.7,178.82 0 bottom
U$464  [#11#PICO_#12]  13.34,176.28 0 bottom
U$465  [#12#POCI_#12]  13.59,173.74 0 bottom
U$466  [#13#SCK_#13]  13.21,171.2 0 bottom
U$467  [#SDA#18]  11.43,163.58 0 bottom
U$468  [#SCL#19]  11.43,161.04 0 bottom
U$469  [#AREF#20]  11.81,166.12 0 bottom
U$470  [#GND#21]  11.56,168.66 0 bottom
U$471  [POWER23]  84.33,201.17 0 top
U$472  [SFE_LOGO_FLAME_.2]  105.16,191.26 0 top
U$473  [RESET25]  102.62,182.12 0 top
U$474  [ON26]  80.17,206.14 0 top
U$475  [OFF27]  71.65,206.06 0 top
U$476  [ANALOG_IN28]  108.71,200.03 90 top
U$477  [USB#C_HOST_SHIELD32]  87.38,172.47 0 bottom
U$478  [SHLD#33]  106.17,208.03 0 top
U$479  [MAIN40]  69.6,204.22 0 top
U$480  [POWER38]  69.6,203.2 0 top
U$481  [GPIN42]  76.84,173.1 0 top
U$482  [GPOUT44]  96.39,173.23 0 top
U$483  [045]  88.77,171.2 0 top
U$484  [146]  91.19,171.2 0 top
U$485  [2147]  93.73,171.2 0 top
U$486  [32148]  96.27,171.2 0 top
U$487  [4332150]  98.81,171.2 0 top
U$488  [4332150]  78.49,171.2 0 top
U$489  [54332151]  81.03,171.2 0 top
U$490  [54332151]  101.35,171.2 0 top
U$491  [654332152]  103.89,171.2 0 top
U$492  [654332152]  83.57,171.2 0 top
U$493  [7654332153]  106.43,171.2 0 top
U$494  [7654332153]  86.11,171.2 0 top
U$495  [045]  68.45,171.2 0 top
U$496  [146]  70.87,171.2 0 top
U$497  [2147]  73.41,171.2 0 top
U$498  [32148]  75.95,171.2 0 top
U$499  [5V6]  80.14,198.63 0 top
U$500  [VIN7]  71.63,198.63 0 top
U$501  [POWER11]  69.47,196.47 0 top
U$502  [SELECT12]  69.47,195.33 0 top
U$503  [GND131211211109876543229]  65.79,168.66 0 top
U$504  [AREF131211211109876543230]  66.04,166.88 0 top
U$505  [RX13]  65.53,205.49 0 top
U$506  [TX1131211211109876543245]  65.66,202.95 0 top
U$507  [21131211211109876543246]  65.02,200.41 0 top
U$508  [321131211211109876543247]  65.02,197.87 0 top
U$509  [4321131211211109876543248]  65.02,195.33 0 top
U$510  [54321131211211109876543249]  65.02,192.79 0 top
U$511  [654321131211211109876543250]  65.02,190.25 0 top
U$512  [7654321131211211109876543251]  65.02,187.71 0 top
U$513  [17654321131211211109876543252]  109.98,195.33 0 top
U$514  [017654321131211211109876543253]  109.98,192.79 0 top
U$515  [21131211211109876543246]  109.98,197.87 0 top
U$516  [321131211211109876543247]  109.98,200.41 0 top
U$517  [4321131211211109876543248]  109.98,202.95 0 top
U$518  [54321131211211109876543249]  109.98,205.49 0 top
U$519  [817654321131211211109876543254]  64.9,183.9 0 top
U$520  [9817654321131211211109876543255]  64.9,181.36 0 top
U$521  [109817654321131211211109876543256]  65.28,178.82 0 top
U$522  [11109817654321131211211109876543257]  65.15,176.28 0 top
U$523  [1211109817654321131211211109876543258]  65.28,173.74 0 top
U$524  [131211109817654321131211211109876543259]  65.28,171.2 0 top
U$525  [GND131211109817654321131211211109876543260]  108.84,185.17 0 top
U$526  [GND131211109817654321131211211109876543260]  108.84,182.63 0 top
U$527  [SDA131211109817654321131211211109876543261]  66.04,163.58 0 top
U$528  [SCL131211109817654321131211211109876543262]  65.91,161.04 0 top
U$529  [IOREF131211109817654321131211211109876543264]  108.2,172.47 0 top
U$530  [RST131211109817654321131211211109876543265]  108.97,175.01 0 top
U$531  [#3#3V4]  108.33,177.55 0 top
U$532  [#5V4]  108.97,180.09 0 top
U$533  [VIN6]  108.97,187.71 0 top
U$534  [#_5#6]  109.98,205.49 0 bottom
U$535  [#_4#6]  109.98,202.95 0 bottom
U$536  [#_3#6]  109.98,200.41 0 bottom
U$537  [#_2#6]  109.98,197.87 0 bottom
U$538  [#_1#6]  110.11,195.33 0 bottom
U$539  [#_0#6]  109.98,192.79 0 bottom
U$540  [#_VIN#6]  109.09,187.71 0 bottom
U$541  [#_GND#7]  108.97,185.17 0 bottom
U$542  [#_GND#7]  108.97,182.63 0 bottom
U$543  [#_#5V#8]  108.97,180.09 0 bottom
U$544  [#_#3#3V#8]  108.2,177.55 0 bottom
U$545  [#_RST#8]  108.97,175.01 0 bottom
U$546  [#_IOREF#9]  108.2,172.47 0 bottom
U$547  [#RX_#10]  65.41,205.49 0 bottom
U$548  [#TX_#11]  65.41,202.95 0 bottom
U$549  [#2_#12]  64.9,200.41 0 bottom
U$550  [#3_#12]  64.9,197.87 0 bottom
U$551  [#4_#12]  64.9,195.33 0 bottom
U$552  [#5_#12]  64.9,192.79 0 bottom
U$553  [#6_#12]  64.9,190.25 0 bottom
U$554  [#7#RESET_#12]  67.69,187.71 0 bottom
U$555  [#8#GPX_#12]  66.8,183.9 0 bottom
U$556  [#9#INT_#12]  66.55,181.36 0 bottom
U$557  [#10#CS_#12]  66.55,178.82 0 bottom
U$558  [#11#PICO_#12]  67.18,176.28 0 bottom
U$559  [#12#POCI_#12]  67.44,173.74 0 bottom
U$560  [#13#SCK_#13]  67.06,171.2 0 bottom
U$561  [#SDA#18]  65.28,163.58 0 bottom
U$562  [#SCL#19]  65.28,161.04 0 bottom
U$563  [#AREF#20]  65.66,166.12 0 bottom
U$564  [#GND#21]  65.41,168.66 0 bottom
U$565  [POWER23]  30.48,269.24 0 top
U$566  [SFE_LOGO_FLAME_.2]  51.31,259.33 0 top
U$567  [RESET25]  48.77,250.19 0 top
U$568  [ON26]  26.33,274.22 0 top
U$569  [OFF27]  17.8,274.13 0 top
U$570  [ANALOG_IN28]  54.86,268.1 90 top
U$571  [USB#C_HOST_SHIELD32]  33.53,240.54 0 bottom
U$572  [SHLD#33]  52.32,276.1 0 top
U$573  [MAIN40]  15.75,272.29 0 top
U$574  [POWER38]  15.75,271.27 0 top
U$575  [GPIN42]  22.99,241.17 0 top
U$576  [GPOUT44]  42.54,241.3 0 top
U$577  [045]  34.92,239.27 0 top
U$578  [146]  37.34,239.27 0 top
U$579  [2147]  39.88,239.27 0 top
U$580  [32148]  42.42,239.27 0 top
U$581  [4332150]  44.96,239.27 0 top
U$582  [4332150]  24.64,239.27 0 top
U$583  [54332151]  27.18,239.27 0 top
U$584  [54332151]  47.5,239.27 0 top
U$585  [654332152]  50.04,239.27 0 top
U$586  [654332152]  29.72,239.27 0 top
U$587  [7654332153]  52.58,239.27 0 top
U$588  [7654332153]  32.26,239.27 0 top
U$589  [045]  14.61,239.27 0 top
U$590  [146]  17.02,239.27 0 top
U$591  [2147]  19.56,239.27 0 top
U$592  [32148]  22.1,239.27 0 top
U$593  [5V6]  26.29,266.7 0 top
U$594  [VIN7]  17.78,266.7 0 top
U$595  [POWER11]  15.62,264.54 0 top
U$596  [SELECT12]  15.62,263.4 0 top
U$597  [GND131211211109876543229]  11.94,236.73 0 top
U$598  [AREF131211211109876543230]  12.19,234.95 0 top
U$599  [RX13]  11.68,273.56 0 top
U$600  [TX1131211211109876543245]  11.81,271.02 0 top
U$601  [21131211211109876543246]  11.18,268.48 0 top
U$602  [321131211211109876543247]  11.18,265.94 0 top
U$603  [4321131211211109876543248]  11.18,263.4 0 top
U$604  [54321131211211109876543249]  11.18,260.86 0 top
U$605  [654321131211211109876543250]  11.18,258.32 0 top
U$606  [7654321131211211109876543251]  11.18,255.78 0 top
U$607  [17654321131211211109876543252]  56.13,263.4 0 top
U$608  [017654321131211211109876543253]  56.13,260.86 0 top
U$609  [21131211211109876543246]  56.13,265.94 0 top
U$610  [321131211211109876543247]  56.13,268.48 0 top
U$611  [4321131211211109876543248]  56.13,271.02 0 top
U$612  [54321131211211109876543249]  56.13,273.56 0 top
U$613  [817654321131211211109876543254]  11.05,251.97 0 top
U$614  [9817654321131211211109876543255]  11.05,249.43 0 top
U$615  [109817654321131211211109876543256]  11.43,246.89 0 top
U$616  [11109817654321131211211109876543257]  11.3,244.35 0 top
U$617  [1211109817654321131211211109876543258]  11.43,241.81 0 top
U$618  [131211109817654321131211211109876543259]  11.43,239.27 0 top
U$619  [GND131211109817654321131211211109876543260]  54.99,253.24 0 top
U$620  [GND131211109817654321131211211109876543260]  54.99,250.7 0 top
U$621  [SDA131211109817654321131211211109876543261]  12.19,231.65 0 top
U$622  [SCL131211109817654321131211211109876543262]  12.06,229.11 0 top
U$623  [IOREF131211109817654321131211211109876543264]  54.36,240.54 0 top
U$624  [RST131211109817654321131211211109876543265]  55.12,243.08 0 top
U$625  [#3#3V4]  54.48,245.62 0 top
U$626  [#5V4]  55.12,248.16 0 top
U$627  [VIN6]  55.12,255.78 0 top
U$628  [#_5#6]  56.13,273.56 0 bottom
U$629  [#_4#6]  56.13,271.02 0 bottom
U$630  [#_3#6]  56.13,268.48 0 bottom
U$631  [#_2#6]  56.13,265.94 0 bottom
U$632  [#_1#6]  56.26,263.4 0 bottom
U$633  [#_0#6]  56.13,260.86 0 bottom
U$634  [#_VIN#6]  55.24,255.78 0 bottom
U$635  [#_GND#7]  55.12,253.24 0 bottom
U$636  [#_GND#7]  55.12,250.7 0 bottom
U$637  [#_#5V#8]  55.12,248.16 0 bottom
U$638  [#_#3#3V#8]  54.36,245.62 0 bottom
U$639  [#_RST#8]  55.12,243.08 0 bottom